# EAGLE board NeoPI-Wireless v44 (EAGLE 9.7.0)
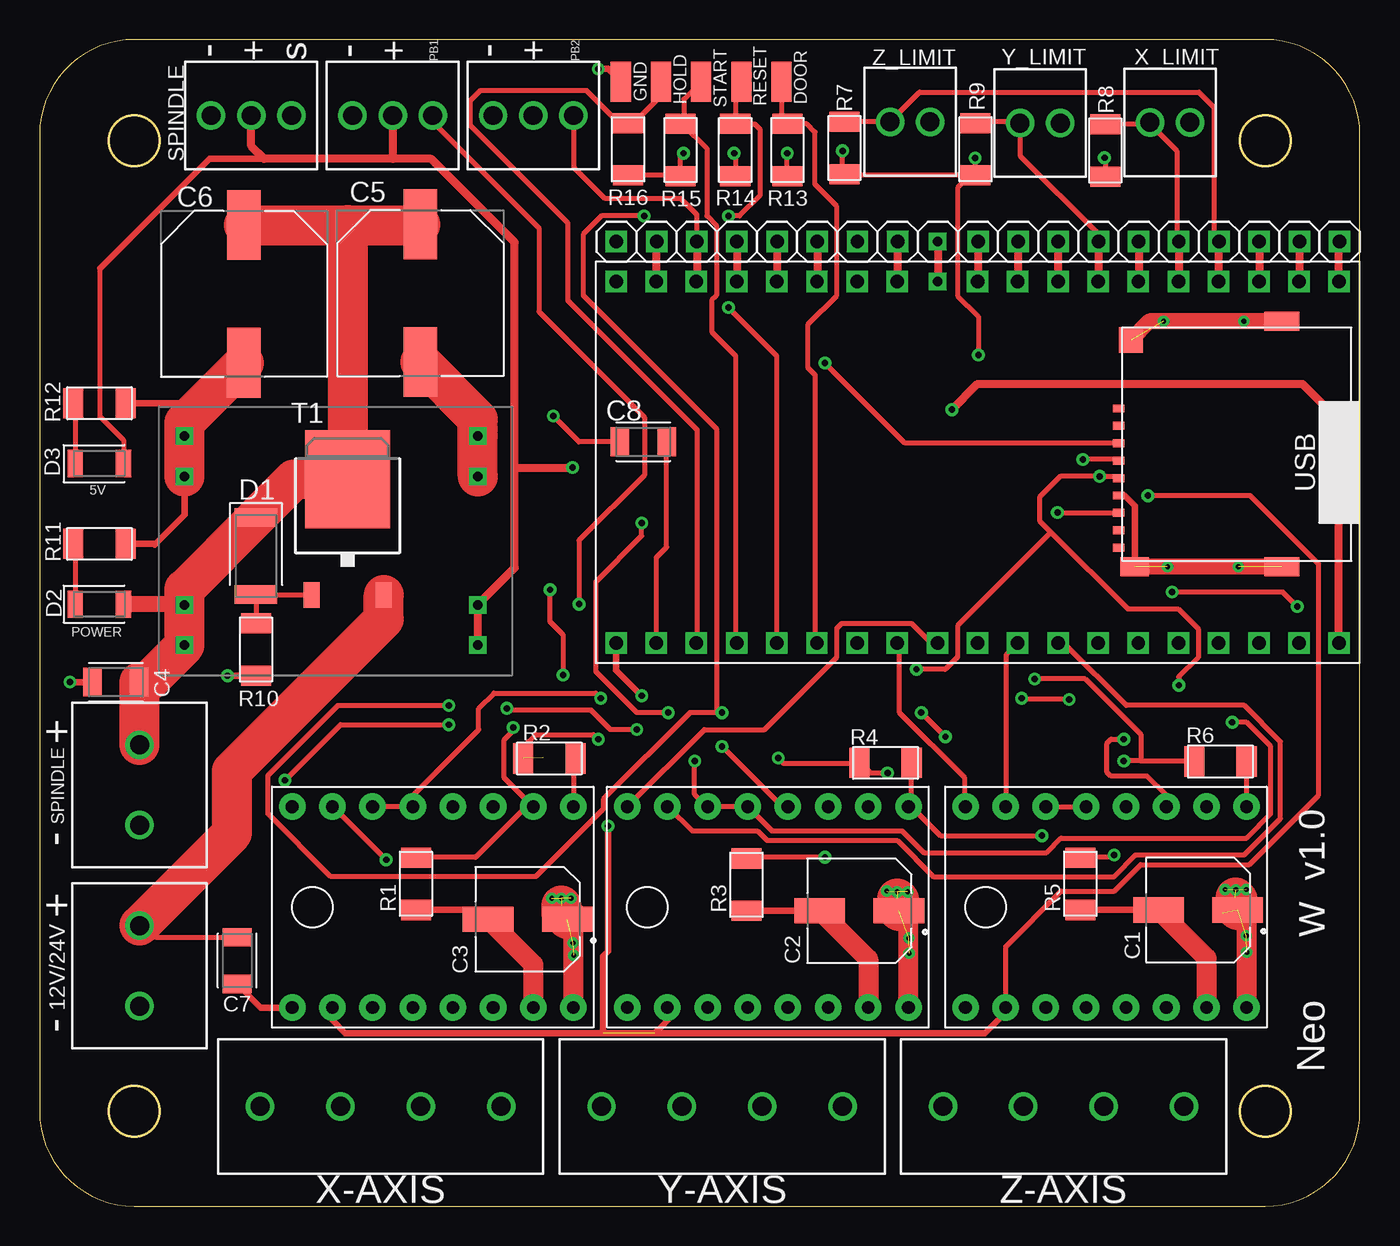
[diagram p0: board, top side]
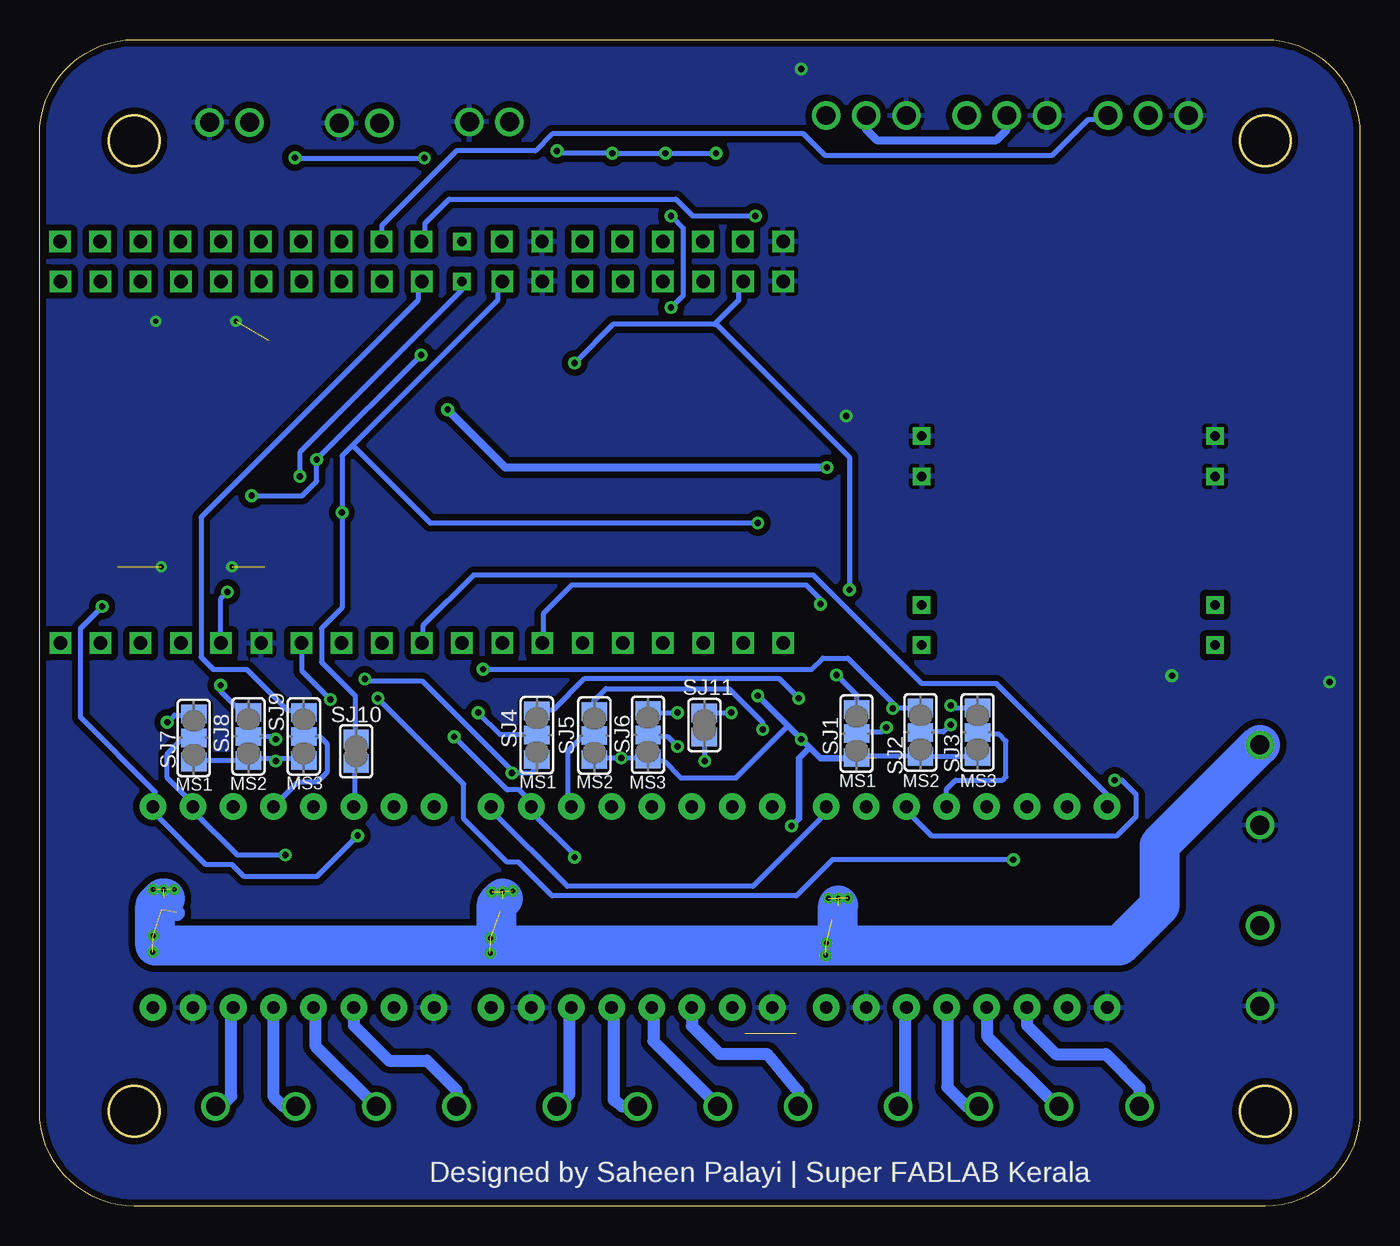
[diagram p1: board, bottom side, seen from below]

Size 83.49 x 73.74 mm. Coordinates in mm from the lower left corner, seen from the top.
Outline: 77.49,0 arc90 83.49,6 83.49,67.74 arc90 77.49,73.74 6,73.74 arc90 0,67.74 0,6 arc90 6,0 77.49,0
Outline: circle at 77.49,6 radius 1.6
Outline: circle at 6,6 radius 1.6
Outline: circle at 6,67.33 radius 1.6
Outline: circle at 77.49,67.33 radius 1.6
Copper layers (1*16): Top 0.035mm / dielectric 1.5mm / Bottom 0.035mm
Design rules "default *": minimum track width 12mil, minimum drill 0.4mm, track to track 12mil, track to pad 16mil, pad to pad 16mil, via to via 16mil, smd to smd 10mil, copper to edge 16mil, drill to drill 6mil, minimum pad ring 10mil, minimum via ring 8mil, stop-mask expansion 4mil, vias tented up to drill 16mil, thermal gap 10mil
Net classes: 1 vcc: width 1.016 mm, drill 0.8 mm, clearance 0.508 mm; 2 motor_out: width 0.762 mm, drill 0.8 mm, clearance 0.508 mm; 3 +5vcc: width 0.406 mm, drill 0.8 mm, clearance 0.508 mm

## Footprints (pad centres in the part's own frame; a part is rotated, then mirrored left to right if it is on the bottom)
CAP_EEEFN1V101XL = smd 3.2 x 1.6: 1 -2.5,0; 2 2.5,0
CAPC3216X135 = smd 1.165 x 1.815: 1 -1.475,0; 2 1.475,0
CAPAE1030X1050N = smd 4.416 x 2.115: 1 -4.353,0; 2 4.353,0
DIOMELF5024 = smd 1.156 x 2.69: 1 -2.43,0; 2 2.43,0
LEDC3216X75N_FLAT-R = smd 0.962 x 1.712: A 1.525,0; C -1.525,0
LEDC3216X75N_FLAT-Y = smd 0.962 x 1.712: A 1.525,0; C -1.525,0
TERMBLK_508-2N = drill 1.2: 1 0,0; 2 5.08,0
TERMBLK_254-3N = drill 1.2: 1 0,0; 2 2.54,0; 3 5.08,0
R1206FAB = smd 1.27 x 1.905: 1 -1.651,0; 2 1.651,0
SJ_2 = smd 1.168 x 1.6: 1 -1.524,0; 2 0,0; 3 1.524,0
SJ = smd 1.168 x 1.6: 1 -0.762,0; 2 0.762,0
TO252 = smd 1 x 1.6: 1 -2.28,-4.8; 2 2.28,-4.8 | smd 5.4 x 6.2: 3 0,2.5
ESP32_GRBL = drill 0.85 square: 3.3V 1.27,46.99; 5V 1.27,1.27; EN 1.27,44.45; GND1 1.27,13.97; GND2 24.13,46.99; GND3 24.13,31.75; GPIO0 24.13,13.97; GPIO2 24.13,11.43; GPIO4 24.13,16.51; GPIO5 24.13,24.13; GPIO6 24.13,1.27; GPIO7 24.13,3.81; GPIO8 24.13,6.35; GPIO9 1.27,8.89; GPIO10 1.27,6.35; GPIO11 1.27,3.81; GPIO12 1.27,16.51; GPIO13 1.27,11.43; GPIO14 1.27,19.05; GPIO15 24.13,8.89; GPIO16 24.13,19.05; GPIO17 24.13,21.59; GPIO19 24.13,29.21; GPIO21 24.13,34.29; GPIO22 24.13,41.91; GPIO23 24.13,44.45; GPIO25 1.27,26.67; GPIO26 1.27,24.13; GPIO27 1.27,21.59; GPIO32 1.27,31.75; GPIO33 1.27,29.21; GPIO34 1.27,36.83; GPIO35 1.27,34.29; GPIO36 1.27,41.91; GPIO39 1.27,39.37; RX 24.13,36.83; TX 24.13,39.37 | drill 0.6 square: GPIO18 24.13,26.67
BOARD_A4988 = drill 0.8 pad 1.676: +5V 1.27,16.51; DIR 13.97,19.05; ENABLE 13.97,1.27; GND 1.27,19.05; GNDMOT 1.27,3.81; M1A 1.27,11.43; M1B 1.27,13.97; M2A 1.27,8.89; M2AB 1.27,6.35; MS1 13.97,3.81; MS2 13.97,6.35; MS3 13.97,8.89; RESET 13.97,11.43; SLEEP 13.97,13.97; STEP 13.97,16.51; VMOT 1.27,1.27
MICROSD-PUSH-OUT = smd 0.5 x 0.75: 1 9.625,0.225; 2 8.525,0.225; 3 7.425,0.225; 4 6.325,0.225; 5 5.225,0.225; 6 4.125,0.225; 7 3.025,0.225; 8 1.925,0.225; CD 0.825,0.225 | smd 1.2 x 1.8: G1 -0.375,-0.8 | smd 1.2 x 2.2: G2 -0.375,-10.1; G4 15.125,-10.1 | smd 1.6 x 1.5: G3 13.95,-0.55
1X19 = drill 0.85 square: 1 -24.13,0; 2 -21.59,0; 3 -19.05,0; 4 -16.51,0; 5 -13.97,0; 6 -11.43,0; 7 -8.89,0; 8 -6.35,0; 10 -1.27,0; 11 1.27,0; 12 3.81,0; 13 6.35,0; 14 8.89,0; 15 11.43,0; 16 13.97,0; 17 16.51,0; 18 19.05,0; 19 21.59,0 | drill 0.6 square: 9 -3.81,0
MINI_BUCK_CONVERTER = drill 0.6 square: 1IN+ 0,0; 1IN- 0,10.668; 1OUT+ 18.542,0; 1OUT- 18.542,10.668; 2IN+ 0,2.54; 2IN- 0,13.208; 2OUT+ 18.542,2.54; 2OUT- 18.542,13.208
1X05_SMD = smd 2.54 x 1.27: 1 0,5.08; 2 0,2.54; 3 0,0; 4 0,-2.54; 5 0,-5.08
TERMBLK_508-4N = drill 1.2: 1 0,0; 2 5.08,0; 3 10.16,0; 4 15.24,0
TERMBLK_254-2N = drill 1.2: 1 0,0; 2 2.54,0

## Placement (x,y rotation side)
C1  EEEFN1V101XL  [CAP_EEEFN1V101XL]  73.25,18.72 180 top
C2  EEEFN1V101XL  [CAP_EEEFN1V101XL]  51.84,18.67 180 top
C3  EEEFN1V101XL  [CAP_EEEFN1V101XL]  30.86,18.14 180 top
C4  0.1uF  [CAPC3216X135]  4.83,33.12 180 top
C5  470uF  [CAPAE1030X1050N]  24.08,57.71 270 top
C6  470uF  [CAPAE1030X1050N]  12.93,57.66 270 top
C7  0.1uF  [CAPC3216X135]  12.5,15.52 270 top
C8  10uF  [CAPC3216X135]  38.18,48.31 180 top
D1  DIODE  [DIOMELF5024]  13.69,41.1 270 top
D2  LED_RED  [LEDC3216X75N_FLAT-R]  3.78,38.05 0 top
D3  LED_YELLOW  [LEDC3216X75N_FLAT-Y]  3.78,46.94 0 top
POWER  2828XX-2282837-2  [TERMBLK_508-2N]  6.32,17.73 270 top
PROBE1  2828XX-3282834-3  [TERMBLK_254-3N]  24.87,68.94 180 top
PROBE2  2828XX-3282834-3  [TERMBLK_254-3N]  33.76,68.94 180 top
R1  100KΩ  [R1206FAB]  23.8,20.37 90 top
R2  10KΩ  [R1206FAB]  32.23,28.3 180 top
R3  100KΩ  [R1206FAB]  44.7,20.32 90 top
R4  10KΩ  [R1206FAB]  53.49,28.02 180 top
R5  100KΩ  [R1206FAB]  65.81,20.37 90 top
R6  10KΩ  [R1206FAB]  74.67,28.1 180 top
R7  10k  [R1206FAB]  50.9,66.88 270 top
R8  10k  [R1206FAB]  67.39,66.73 270 top
R9  10k  [R1206FAB]  59.18,66.8 270 top
R10  1KΩ  [R1206FAB]  13.69,35.18 270 top
R11  1KΩ  [R1206FAB]  3.78,41.86 0 top
R12  500Ω  [R1206FAB]  3.78,50.75 0 top
R13  10k  [R1206FAB]  47.3,66.75 270 top
R14  10k  [R1206FAB]  43.99,66.75 270 top
R15  10k  [R1206FAB]  40.54,66.75 270 top
R16  10k  [R1206FAB]  37.21,66.8 270 top
SJ1  [SJ_2]  31.83,29.87 90 bottom
SJ2  [SJ_2]  27.79,29.95 90 bottom
SJ3  [SJ_2]  24.18,29.95 90 bottom
SJ4  [SJ_2]  52.04,29.77 90 bottom
SJ5  [SJ_2]  48.41,29.74 90 bottom
SJ6  [SJ_2]  45.02,29.79 90 bottom
SJ7  [SJ_2]  73.74,29.59 90 bottom
SJ8  [SJ_2]  70.28,29.69 90 bottom
SJ9  [SJ_2]  66.78,29.69 90 bottom
SJ10  [SJ]  63.47,28.75 270 bottom
SJ11  [SJ]  41.45,30.4 270 bottom
SPINDLE  2828XX-3282834-3  [TERMBLK_254-3N]  15.93,68.94 180 top
SPINDLE_POWER  2828XX-2282837-2  [TERMBLK_508-2N]  6.32,29.16 270 top
T1  [TO252]  19.48,43.43 0 top
U$1  ESP32_GRBL  [ESP32_GRBL]  83.45,34.32 90 top
U$2  BOARD_A4988  [BOARD_A4988]  35.03,11.28 90 top
U$3  MICROSD-PUSH-OUT  [MICROSD-PUSH-OUT]  68.45,40.79 90 top
U$4  PINHD-1X19  [1X19]  60.61,60.96 0 top
U$5  BOARD_A4988  [BOARD_A4988]  56.21,11.28 90 top
U$6  MINI-360_DC-TO-DC_BUCK_CONVERTER  [MINI_BUCK_CONVERTER]  9.17,35.46 0 top
U$7  BOARD_A4988  [BOARD_A4988]  77.6,11.28 90 top
U$8  1X05_SMD  [1X05_SMD]  41.83,71.07 90 top
X-AXIS  2828XX-4282837-4  [TERMBLK_508-4N]  13.94,6.3 0 top
X_LIMIT  2828XX-2282834-2  [TERMBLK_254-2N]  72.75,68.5 180 top
Y-AXIS  2828XX-4282837-4  [TERMBLK_508-4N]  35.53,6.3 0 top
Y_LIMIT  2828XX-2282834-2  [TERMBLK_254-2N]  64.54,68.45 180 top
Z-AXIS  2828XX-4282837-4  [TERMBLK_508-4N]  57.12,6.3 0 top
Z_LIMIT  2828XX-2282834-2  [TERMBLK_254-2N]  56.31,68.54 180 top

## Library data of the parts
C1-C3 = EEEFN1V101XL; MANUFACTURER: Panasonic; MAXIMUM_PACKAGE_HEIGHT: 7.7mm; PARTREV: 10-Oct-19; STANDARD: Manufacturer Recommendations
C4-C8 = Capacitor; CATEGORY: Capacitor
D1 = Diode; CATEGORY: Diode; SUB-CATEGORY: Rectifier
D2 = LED; CATEGORY: LED; COLOR: RED; DESCRIPTION: CHIP LED FLAT; SUB-CATEGORY: CHIP; TYPE: FLAT_TOP
D3 = LED; CATEGORY: LED; COLOR: YELLOW; DESCRIPTION: CHIP LED FLAT; SUB-CATEGORY: CHIP; TYPE: FLAT_TOP
POWER SPINDLE_POWER = Connector; CATEGORY: Connector; DESCRIPTION: 2 Position Wire to Board Terminal Block Horizontal with Board 5.08 mm Through Hole; MANUFACTURER: TE Connectivity; MPN: 282837-2; OPERATING_TEMPERATURE: -40°C to +105°C; PART_STATUS: ACTIVE; ROHS_COMPLIANCE: RoHS Compliant; SERIES: 282837; SUBCATEGORY: Terminal Block; TYPE: Side Wire Entry
PROBE1 PROBE2 SPINDLE = Connector; CATEGORY: Connector; DESCRIPTION: TERM BLK 3P SIDE ENT 2.54mm PCB; MANUFACTURER: TE Connectivity; MPN: 282834-3; OPERATING_TEMPERATURE: -40°C to +105°C; PART_STATUS: Active; ROHS_COMPLIANCE: RoHS Compliant; SERIES: 282834; SUBCATEGORY: Terminal Block; TYPE: Side Wire Entry
R1-R16 T1 U$4 U$8 = files_fab
SJ1-SJ11 = jumper
U$1 = ESP32-GRBL
U$2 U$5 U$7 = Clean-Kong
U$3 = microsd
U$6 = MINI-BUCK-CONVERTER
X-AXIS Y-AXIS Z-AXIS = Connector; CATEGORY: Connector; DESCRIPTION: TERM BLK 4P SIDE ENT 5.08mm PCB; MANUFACTURER: TE Connectivity; MPN: 282837-4; OPERATING_TEMPERATURE: 40°C to +105°C; PART_STATUS: Active; ROHS_COMPLIANCE: RoHS Compliant; SERIES: 283737; SUBCATEGORY: Terminal Block; TYPE: Side Wire Entry
X_LIMIT Y_LIMIT Z_LIMIT = Connector

## Nets
+3.3V: R2.2 R4.2 R6.2 R7.2 R8.2 R9.2 R13.2 R14.2 R15.2 R16.2 SJ1.1 SJ2.1 SJ3.1 SJ4.1 SJ5.1 SJ6.1 SJ7.1 SJ8.1 SJ9.1 U$1.3.3V U$2.+5V U$3.4 U$5.+5V U$7.+5V
+5V: D3.A PROBE1.2 PROBE2.2 SPINDLE.2 U$1.5V U$6.1OUT+ U$6.2OUT+
CS: SJ3.3 SJ6.3 SJ9.3 U$1.GPIO5 U$4.10
CS_SD: U$3.2
DOOR: R13.1 U$1.GPIO35 U$8.5
GND [gnd]: C1.2 C2.2 C3.2 C4.2 C5.2 C6.2 C7.2 C8.2 POWER.2 PROBE1.3 PROBE2.3 R1.1 R3.1 R5.1 R10.2 R11.2 R12.2 SPINDLE.3 SPINDLE_POWER.2 U$1.GND1 U$1.GND2 U$1.GND3 U$2.GND U$2.GNDMOT U$3.6 U$3.G1 U$3.G2 U$3.G3 U$3.G4 U$4.1 U$4.7 U$5.GND U$5.GNDMOT U$6.1IN- U$6.1OUT- U$6.2IN- U$6.2OUT- U$7.GND U$7.GNDMOT U$8.1 X_LIMIT.1 Y_LIMIT.1 Z_LIMIT.1
GRBL_RESET: R14.1 U$1.GPIO34 U$8.4
HOLD: R16.1 U$1.GPIO36 U$8.2
MISO: SJ10.1 SJ11.1 U$1.GPIO19 U$3.7 U$4.8
MOSI: SJ1.3 U$1.GPIO23 U$3.3 U$4.2
N$1 [motor_out]: U$2.M1B X-AXIS.1
N$2 [motor_out]: U$2.M1A X-AXIS.2
N$3 [motor_out]: U$2.M2A X-AXIS.3
N$4 [motor_out]: U$2.M2AB X-AXIS.4
N$5: U$1.TX U$4.4
N$6: D2.C R11.1
N$7: U$1.GPIO21 U$4.6
N$8 [motor_out]: U$5.M1B Y-AXIS.1
N$9 [motor_out]: U$5.M1A Y-AXIS.2
N$10: D3.C R12.1
N$11: C8.1 U$1.EN
N$12 [motor_out]: U$5.M2A Y-AXIS.3
N$13 [motor_out]: U$5.M2AB Y-AXIS.4
N$14 [motor_out]: U$7.M1B Z-AXIS.1
N$15 [motor_out]: U$7.M1A Z-AXIS.2
N$16: SJ10.2 U$7.RESET U$7.SLEEP
N$17 [motor_out]: U$7.M2A Z-AXIS.3
N$18 [motor_out]: U$7.M2AB Z-AXIS.4
N$19: U$1.RX U$4.5
N$21: U$1.GPIO16 U$4.12
N$22: C7.1 POWER.1 T1.2
N$23: U$1.GPIO0 U$4.14
N$26: U$1.GPIO8 U$4.17
N$27: U$1.GPIO7 U$4.18
N$28: U$1.GPIO6 U$4.19
N$30: D1.2 R10.1 T1.1
PROBE1: PROBE1.1 U$1.GPIO32
PROBE2: PROBE2.1 U$1.GPIO22 U$4.3
SCK: SJ2.3 SJ5.3 SJ8.3 U$1.GPIO18 U$3.5 U$4.9
SPINDLE_PWM: SPINDLE.1 U$1.GPIO17 U$4.11
START: R15.1 U$1.GPIO39 U$8.3
STEPPER_EN: R2.1 R4.1 R6.1 U$1.GPIO13 U$2.ENABLE U$5.ENABLE U$7.ENABLE
TO_Y: SJ4.3 U$2.RESET U$2.SLEEP
TO_Z: SJ7.3 SJ11.2 U$5.RESET U$5.SLEEP
VCC [vcc]: C1.1 C2.1 C3.1 C4.1 C5.1 C6.1 D1.1 D2.A SPINDLE_POWER.1 T1.3 U$2.VMOT U$5.VMOT U$6.1IN+ U$6.2IN+ U$7.VMOT
X-MS1: R1.2 SJ1.2 U$2.MS1
X-MS2: SJ2.2 U$2.MS2
X-MS3: SJ3.2 U$2.MS3
X_DIR: U$1.GPIO26 U$2.DIR
X_LIMIT: R8.1 U$1.GPIO2 U$4.15 X_LIMIT.2
X_STEP: U$1.GPIO12 U$2.STEP
Y-MS1: R3.2 SJ4.2 U$5.MS1
Y-MS2: SJ5.2 U$5.MS2
Y-MS3: SJ6.2 U$5.MS3
Y_DIR: U$1.GPIO25 U$5.DIR
Y_LIMIT: R9.1 U$1.GPIO4 U$4.13 Y_LIMIT.2
Y_STEP: U$1.GPIO14 U$5.STEP
Z-MS1: R5.2 SJ7.2 U$7.MS1
Z-MS2: SJ8.2 U$7.MS2
Z-MS3: SJ9.2 U$7.MS3
Z_DIR: U$1.GPIO33 U$7.DIR
Z_LIMIT: R7.1 U$1.GPIO15 U$4.16 Z_LIMIT.2
Z_STEP: U$1.GPIO27 U$7.STEP

## Tracks (layer width: path | path; a pad name or v marks a point on that pad's centre or on a via)
+3.3V  (via drill 0.4)  (2 unrouted)
  Top 0.305: R16.2 37.31,65.18 40.51,65.18 R15.2 40.51,65.33 40.51,66.35 v40.72,66.55 | v43.92,66.55 44.02,66.45 44.02,65.18 R14.2 | v47.27,66.55 47.27,65.13 R13.2 | v65.96,47.19 68.1,47.19 U$3.4 | v59.36,53.8 59.36,56.24 58.04,57.56 58.04,64.36 58.83,65.15 R9.2 | R9.2 59.11,65.02 59.13,65.05 59,65.18 51.03,65.18 R7.2 50.88,65.33 50.77,65.43 v50.77,66.7 | v67.34,66.27 67.39,66.22 R8.2 | v59.16,66.24 59.16,65.18 R9.2 | 39.34,11.38 38.89,10.92 | 69.62,28.14 v68.55,28.14 | 69.62,28.14 72.97,28.14 R6.2 | v53.62,27.38 52.55,27.38 51.94,27.99 R4.2 51.79,27.99 47.04,27.99 v46.71,28.32 | 69.62,28.14 69.62,29.82 66.12,33.33 v62.92,33.33 | U$7.+5V 61.09,16.41 64.59,19.91 67.94,19.91 69.62,21.59 76.48,21.59 80.87,25.98 80.87,40.59 76.55,44.91 v70.08,44.91 | R2.2 30.58,29 31.39,29.81 35.01,29.81 35.3,29.52 v35.33,29.52
  Top 0.406: U$1.3.3V 36.46,33.88 v38.07,32.26 | v35.94,24.03 35.94,16.1 35.64,15.8 35.64,10.92 | U$2.+5V 18.52,11.74 19.33,10.92 38.99,10.92 | 38.99,10.92 38.99,11.02 39.34,11.38 39.7,11.74 U$5.+5V | 38.99,10.92 59.77,10.92 61.09,12.24 U$7.+5V
  Bottom 0.305: v40.72,66.55 v43.92,66.55 v47.27,66.55 50.77,66.55 v50.77,66.7 | v59.36,53.8 v65.96,47.19 65.96,45.82 66.88,44.91 v70.08,44.91 | v67.34,66.27 67.31,66.24 v59.16,66.24 | SJ3.1 24.21,28.45 27.71,28.45 SJ2.1 27.86,28.45 31.83,28.45 SJ1.1 | 34.11,28.3 34.8,28.98 36.17,30.35 | 36.17,30.35 v38.07,32.26 | 31.98,28.3 SJ1.1 | 68.55,28.3 70.23,28.3 SJ8.1 70.38,28.14 73.74,28.14 SJ7.1 | 68.55,28.3 66.88,28.3 SJ9.1 | 68.55,28.3 v68.55,28.14 | SJ4.1 52.04,27.74 52.4,27.38 v53.62,27.38 53.62,27.53 59.26,33.17 62.76,33.17 v62.92,33.33 | 48.49,28.09 48.44,28.14 SJ5.1 48.29,28.3 48.26,28.32 v46.71,28.32 45.16,28.32 45.14,28.3 SJ6.1 44.98,28.14 44.02,28.14 42.95,27.08 39.45,27.08 36.17,30.35 | 32.21,28.73 SJ1.1
  Bottom 0.406: v38.07,32.26 34.11,28.3 31.98,28.3 | 34.8,28.98 35.48,28.3 35.48,24.49 v35.94,24.03
+5V  (via drill 0.4)
  Top 0.305: 3.84,59.28 3.84,49.89 5.31,48.41 5.31,47.04 D3.A | 13.39,68.83 SPINDLE.2 | 82.12,35.61 U$1.5V
  Top 0.406: 3.84,59.28 10.74,66.19 14.2,66.19
  Top 0.508: 30.05,46.69 30.05,40.34 U$6.2OUT+ U$6.1OUT+ | 30.05,46.69 30.05,60.91 24.76,66.19 22.33,66.19 | 22.33,66.19 14.2,66.19 13.39,67.01 SPINDLE.2 | PROBE1.2 22.33,66.19 | 30.05,46.69 v33.71,46.69 | v57.68,50.34 59.31,51.97 79.85,51.97 82.12,49.7 82.12,35.61
  Bottom 0.508: PROBE1.2 22.33,68.05 23,67.38 30.54,67.38 31.22,68.05 PROBE2.2 | v33.71,46.69 54.03,46.69 v57.68,50.34
CS  (via drill 0.4)
  Top 0.305: v25.88,31.65 18.87,31.65 14.45,27.23 14.45,24.79 18.41,20.83 31.37,20.83 35.64,25.1 35.64,25.71 41.12,31.19 42.8,31.19 | v43.15,31.19 42.8,31.19 | v38.23,62.59 35.53,62.59 34.37,61.42 34.37,57.57 42.8,49.14 42.8,31.19
  Top 0.508: U$4.10 59.34,58.47 U$1.GPIO5
  Bottom 0.305: v25.88,31.65 25.73,31.5 24.21,31.5 SJ3.3 | v43.15,31.19 44.98,31.19 SJ6.3 | SJ9.3 66.88,31.34 67.79,31.34 70.38,33.93 72.52,33.93 73.28,34.7 73.28,43.54 59.56,57.25 59.56,58.17 59.41,58.32 U$1.GPIO5 | v38.23,62.59 42.19,62.59 43.26,63.65 57.58,63.65 59.11,62.13 59.11,61.21 59.26,61.06 U$4.10
DOOR
  Top 0.305: U$8.5 46.91,69.04 R13.1 48.51,68.4 49.03,67.88 49.03,64.58 50.42,63.2 50.42,57.56 48.59,55.73 48.59,52.98 49.05,52.53 49.05,35.61 U$1.GPIO35
GND  (via drill 0.3, 0.4)  (3 unrouted)
  Top 0.305: C8.2 34.11,48.31 v32.49,49.94
  Top 0.406: C4.2 v1.93,33.12 | v11.89,33.53 R10.2 | R11.2 7.24,41.86 7.29,41.81 9.18,43.7 9.18,46.11 U$6.1IN- | C7.2 13.99,12.55 U$2.GND | U$8.1 35.94,71.88 v35.33,71.88 | U$3.6 68.24,44.91 68.63,44.91 69.25,44.28 U$3.G1 | C1.2 R5.1 | R3.1 C2.2 | R1.1 27.78,18.72 C3.2 | R12.2 10.13,50.75 10.25,50.63
  Top 1.016: U$3.G4 70.18,55.92 U$3.G3 | U$3.G2 U$3.G1
  Top 1.27: 27.71,49.12 27.71,49.72 | C1.2 73.79,15.69 U$7.GNDMOT | C2.2 52.4,15.61 U$5.GNDMOT | C3.2 31.22,15.28 U$2.GNDMOT
  Top 2.54: C6.2 10.25,50.63 9.17,49.55 U$6.2IN- U$6.1IN- | U$6.1OUT- 27.71,49.12 | U$6.2OUT- 27.71,49.72 C5.2
  other vias: 75.79,40.41 71.32,40.41 76.15,55.93 71.07,55.93
  pour Bottom (isolate 0.406): 0.04,-0.71 82.82,-0.71 84.35,0.83 84.35,73.04 83.63,73.76 0.44,73.76 -0.28,73.04 -0.28,-0.39
GRBL_RESET  (via drill 0.4)
  Top 0.305: U$8.4 44.32,70.97 44.02,70.66 44.02,68.53 R14.1 45.21,68.4 45.54,68.07 45.54,63.86 44.27,62.59 v43.56,62.59 | v43.56,56.79 46.61,53.75 46.61,35.61 U$1.GPIO34
  Bottom 0.305: v43.56,56.79 42.8,57.56 42.8,61.82 v43.56,62.59
HOLD
  Top 0.305: U$8.2 39.29,70.18 37.57,68.45 R16.1 37.26,68.71 36.4,68.71 34.59,70.51 27.86,70.51 27.22,69.86 27.22,68.33 33.4,62.15 33.4,57.25 41.58,49.07 41.58,35.61 U$1.GPIO36
MISO  (via drill 0.4)
  Top 0.305: v39.75,31.19 37.77,31.19 35.18,33.78 35.18,39.47 38.07,42.37 v38.07,43.18 | v64.36,43.84 68.2,43.84 U$3.7
  Top 0.508: U$4.8 54.26,58.47 U$1.GPIO19
  Bottom 0.305: 63.7,48.08 54.53,57.25 54.53,58.17 54.38,58.32 U$1.GPIO19 | 63.7,48.08 64.36,47.42 v64.36,43.84 64.36,37.82 65.66,36.53 65.66,34.39 63.53,32.26 63.53,29.57 SJ10.1 | v39.75,31.19 41.43,31.19 SJ11.1 | 63.7,48.08 58.8,43.18 v38.07,43.18
MOSI  (via drill 0.4)
  Top 0.305: v49.66,53.29 54.69,48.26 68.1,48.26 U$3.3 | v32.28,38.96 32.28,36.93 33.1,36.12 v33.1,33.58
  Top 0.508: U$4.2 39.02,58.47 U$1.GPIO23
  Bottom 0.305: v49.66,53.29 47.22,55.73 40.82,55.73 40.74,55.8 | 40.74,55.8 39.29,57.25 39.29,58.17 39.14,58.32 U$1.GPIO23 | SJ1.3 31.83,32.31 v33.1,33.58 | v32.28,38.96 32.28,47.35 40.74,55.8
N$1
  Bottom 0.762: X-AXIS.1 13.94,7.46 16.08,9.6 19.23,9.6 21.06,11.43 U$2.M1B
N$2
  Bottom 0.762: U$2.M1A 23.58,12.54 23.58,10.75 19.14,6.3 X-AXIS.2
N$3
  Bottom 0.762: X-AXIS.3 24.88,6.3 26.1,7.52 26.1,12.52 U$2.M2A
N$4
  Bottom 0.762: U$2.M2AB 28.75,12.52 28.75,6.79 29.17,6.38 X-AXIS.4
N$5
  Top 0.508: U$4.4 44.1,58.47 U$1.TX
N$6
  Top 0.305: D2.C 2.26,41.86 R11.1
N$7
  Top 0.305: 49.2,58.47 U$1.GPIO21
  Top 0.508: U$4.6 49.18,58.49 49.2,58.47
N$8
  Bottom 0.762: U$5.M1B 42.24,11.38 40.49,9.63 37.49,9.63 35.53,7.27 Y-AXIS.1
N$9
  Bottom 0.762: Y-AXIS.2 40.61,6.36 44.68,10.43 44.68,12.52 U$5.M1A
N$10
  Top 0.305: D3.C 2.26,47.04 2.26,50.7 R12.1
N$11
  Top 0.305: U$1.EN 39,41 39.65,41.66 C8.1
N$12
  Bottom 0.762: U$5.M2A 47.19,12.52 47.19,6.71 46.64,6.3 Y-AXIS.3
N$13
  Bottom 0.762: U$5.M2AB 49.99,12.52 49.99,7.07 50.69,6.38 Y-AXIS.4
N$14
  Bottom 0.762: Z-AXIS.1 57.12,7.33 58.99,9.2 61.4,9.2 63.63,11.43 U$7.M1B
N$15
  Bottom 0.762: Z-AXIS.2 66.05,10.15 66.05,12.52 U$7.M1A
N$16
  Top 0.305: U$7.SLEEP U$7.RESET
  Bottom 0.305: U$7.SLEEP 63.53,25.35 63.53,27.89 SJ10.2
N$17
  Bottom 0.762: U$7.M2A 68.71,6.96 68.05,6.3 Z-AXIS.3
N$18
  Bottom 0.762: Z-AXIS.4 72.01,6.3 71.36,6.95 71.36,12.52 U$7.M2AB
N$19
  Top 0.508: U$4.5 46.64,58.47 U$1.RX
N$21
  Top 0.508: U$4.12 64.42,58.47 U$1.GPIO16
N$22
  Top 0.305: C7.1 12.41,16.99 7.38,16.99 6.68,17.69 6.4,17.69 POWER.1
  Top 2.54: POWER.1 12.17,23.57 12.17,27.51 21.76,37.11 T1.2
N$23
  Top 0.508: U$4.14 69.5,58.47 U$1.GPIO0
N$26
  Top 0.305: 77.09,58.47 U$1.GPIO8
  Top 0.508: U$4.17 77.12,58.5 77.09,58.47
N$27
  Top 0.305: 79.68,58.47 U$1.GPIO7
  Top 0.508: U$4.18 79.66,58.49 79.68,58.47
N$28
  Top 0.305: 82.12,58.47 U$1.GPIO6
  Top 0.508: U$4.19 82.12,60.89 82.12,58.47
N$30
  Top 0.305: D1.2 17.2,38.66 T1.1 | D1.2 R10.1 | D1.2
PROBE1  (via drill 0.4)
  Top 0.305: PROBE1.1 24.87,68.53 31.57,61.82 31.57,56.53 38.25,49.86 38.25,46.21 34.11,42.07 v34.11,38.05
  Bottom 0.305: v34.11,38.05 34.11,38.35 35.03,39.27 49.81,39.27 51.64,37.44 51.64,35.61 U$1.GPIO32
PROBE2
  Top 0.305: 41.58,58.47 U$1.GPIO22 | PROBE2.1 33.81,68.83 33.81,65.63 35.76,63.68 40.55,63.68 41.56,62.67 U$4.3
  Top 0.508: U$4.3 41.56,58.49 41.58,58.47
SCK  (via drill 0.4)
  Top 0.305: v37.77,30.12 36.09,30.12 34.87,31.34 29.66,31.34 v29.54,31.46 | U$3.5 68.1,46.13 v67.03,46.13 64.54,46.13 63.22,44.81 63.22,43.33 63.96,42.6 | 63.96,42.6 68.81,37.74 72,37.74 73.25,36.5 73.25,34.68 72.03,33.46 v72.03,32.92 | v55.45,33.93 57.28,33.93 58.04,34.7 58.04,36.68 63.96,42.6
  Top 0.508: U$4.9 56.8,58.47 U$1.GPIO18
  Bottom 0.305: v37.77,30.12 37.77,30.58 39.9,32.72 47.68,32.72 48.44,31.95 48.44,31.34 SJ5.3 | SJ2.3 27.86,31.5 29.39,31.5 29.54,31.34 v29.54,31.46 29.54,31.8 32.38,34.65 33.96,34.65 34.67,33.93 v55.45,33.93 | v67.03,46.13 67.03,47.65 56.82,57.86 56.82,58.32 U$1.GPIO18 | v72.03,32.92 72.03,32.54 70.71,31.22 SJ8.3
SPINDLE_PWM
  Top 0.305: 61.85,58.47 U$1.GPIO17
  Top 0.508: U$4.11 61.88,58.5 61.85,58.47
  Bottom 0.305: U$4.11 61.85,61.06 61.85,61.98 57.12,66.7 52.13,66.7 51.07,67.77 35.18,67.77 33.81,66.4 19.48,66.4 17.2,68.68 16.13,68.68 15.98,68.83 SPINDLE.1
START
  Top 0.305: U$8.3 40.74,69.98 40.74,68.4 R15.1 40.67,68.38 42.19,66.85 42.19,62.59 42.8,61.98 42.8,57.56 42.49,57.25 42.49,55.27 44.02,53.75 44.02,35.61 U$1.GPIO39
STEPPER_EN  (via drill 0.4)
  Top 0.305: U$7.ENABLE 76.33,27.99 R6.1 | v71.6,38.81 78.61,38.81 v79.53,37.9 | R4.1 55.14,25.4 54.99,25.25 U$5.ENABLE 55.14,25.25 56.97,23.42 v63.37,23.42 | R2.1 33.81,28.3 33.81,25.25 U$2.ENABLE
  Bottom 0.305: v71.6,38.81 72.06,38.35 72.06,35.61 U$1.GPIO13 | v79.53,37.9 80.9,36.53 80.9,30.89 76.17,26.16 76.17,25.4 U$7.ENABLE 76.17,25.25 76.17,24.79 72.97,21.59 71.3,21.59 70.54,20.83 65.96,20.83 v63.37,23.42 | U$5.ENABLE 54.84,25.25 54.84,24.94 50.11,20.22 38.38,20.22 33.81,24.79 33.81,25.25 U$2.ENABLE
TO_Y  (via drill 0.4)
  Top 0.305: U$2.SLEEP U$2.RESET 23.6,25.95 27.77,30.12 27.77,31.46 28.74,32.43 35.16,32.43 v35.48,32.11
  Bottom 0.305: v35.48,32.11 36.7,33.33 49.05,33.33 51.03,31.34 51.94,31.34 SJ4.3
TO_Z  (via drill 0.4)
  Top 0.305: v41.43,28.14 41.43,26.01 42.19,25.25 U$5.SLEEP U$5.RESET 46.3,23.72 54.53,23.72 55.91,22.35 63.68,22.35 64.59,23.27 76.33,23.27 77.85,24.79 77.85,29.06 76.33,30.58 v75.41,30.58
  Bottom 0.305: v41.43,28.14 41.43,29.52 SJ11.2 | v75.41,30.58 74.96,31.04 73.74,31.04 SJ7.3
VCC  (via drill 0.3)  (17 unrouted)
  Top 1.016: 33.36,18.09 C3.1 | D2.A 8.05,38.05 U$6.2IN+
  Top 1.27: U$2.VMOT 33.76,17.69 33.36,18.09 | U$5.VMOT 54.94,18.07 C2.1 | U$7.VMOT 76.33,18.15 C1.1
  Top 2.54: C6.1 19.48,62.01 | 19.48,62.01 24.03,62.01 C5.1 | 19.48,62.01 T1.3 16.1,45.93 D1.1 9.17,39.01 U$6.2IN+ U$6.1IN+ 6.83,33.12 C4.1 6.3,29.18 SPINDLE_POWER.1 | C3.1 32.99,18.5 32.99,19 | C2.1 54.34,19.34 54.23,19.46 | C1.1 75.75,19.37 75.62,19.51
  Bottom 1.016: 6.26,29.15 SPINDLE_POWER.1 | 74.8,18.54 75.56,19.46
  Bottom 2.54: SPINDLE_POWER.1 12.67,22.81 12.67,19 15.21,16.46 32.99,16.46 | 32.99,16.46 35.48,16.46 54.58,16.46 | 54.58,16.46 56.51,16.46 76.17,16.46 76.17,19 75.72,19.46 75.56,19.46 | 54.58,16.46 54.58,19.08 54.2,19.46 | 32.99,16.46 32.99,19
  other vias: 32.39,19.46 32.99,19.46 33.6,19.46 33.73,16.64 33.78,15.85 54.99,15.98 54.97,16.94 53.57,19.91 54.23,19.86 54.89,19.86 74.96,20.02 75.64,19.99 76.3,20.02 76.3,17.09 76.33,16.05
X-MS1  (via drill 0.4)
  Top 0.305: v29.95,30.25 29.95,30.05 29.39,29.49 29.39,27.08 U$2.MS1 30.91,25.4 27.56,22.05 23.9,22.05 R1.2
  Bottom 0.305: v29.95,30.25 30.23,29.97 31.83,29.97 SJ1.2
X-MS2  (via drill 0.4)
  Top 0.305: v25.88,30.43 19.02,30.43 v15.52,26.92
  Bottom 0.305: v25.88,30.43 26.34,29.97 27.71,29.97 SJ2.2 | v15.52,26.92 15.06,26.92 14.15,26.01 14.15,24.64 15.37,23.42 27.1,23.42 28.63,24.94 28.63,25.25 U$2.MS2
X-MS3
  Bottom 0.305: SJ3.2 24.05,29.82 22.81,29.82 22.38,29.39 22.38,27.13 22.58,26.92 25.58,26.92 26.14,26.37 U$2.MS3
X_DIR
  Bottom 0.305: U$2.DIR 15.98,26.01 22.99,33.02 27.71,33.02 34.57,39.88 56.06,39.88 59.26,36.68 59.26,35.61 U$1.GPIO26
X_LIMIT
  Top 0.305: 72.06,58.47 U$1.GPIO2 | R8.1 70.08,68.38 X_LIMIT.2 70.23,68.38 71.91,66.7 71.91,61.06 U$4.15
  Top 0.508: U$4.15 72.04,58.49 72.06,58.47
X_STEP  (via drill 0.4)
  Top 0.305: v62.1,32.11 62.15,32.06 65.07,32.06 v65.1,32.03 | v21.92,21.9 18.57,25.25 U$2.STEP
  Bottom 0.305: v65.1,32.03 66.88,33.81 66.88,35.46 U$1.GPIO12 | v62.1,32.11 56.67,26.67 56.67,24.49 53.92,21.74 53.21,21.74 51.08,19.61 35.64,19.61 33.35,21.9 v21.92,21.9
Y-MS1  (via drill 0.4)
  Top 0.305: v57.28,29.67 v55.75,31.19 | v49.66,22.05 44.78,22.05 R3.2
  Bottom 0.305: v55.75,31.19 54.38,29.82 52.1,29.82 SJ4.2 | v57.28,29.67 53.92,26.31 53.16,26.31 52.4,25.55 U$5.MS1 52.4,24.94 49.66,22.2 v49.66,22.05
Y-MS2
  Bottom 0.305: U$5.MS2 50.11,25.5 50.11,28.75 49.2,29.67 48.44,29.67 SJ5.2
Y-MS3  (via drill 0.4)
  Top 0.305: U$5.MS3 46.96,25.25 v43.15,29.06
  Bottom 0.305: v43.15,29.06 43.76,29.67 44.98,29.67 SJ6.2
Y_DIR
  Top 0.305: U$5.DIR 42.04,30.12 45.85,30.12 50.42,34.7 50.42,36.53 50.72,36.83 55.14,36.83 56.36,35.61 56.67,35.61 U$1.GPIO25
Y_LIMIT
  Top 0.305: R9.1 59.26,68.53 62,68.53 Y_LIMIT.2 62,66.4 66.88,61.52 66.88,61.06 U$4.13
  Top 0.508: U$4.13 66.94,60.94 U$1.GPIO4
Y_STEP
  Top 0.305: U$1.GPIO14 64.44,35.46 64.9,35.46 68.71,31.65 76.17,31.65 78.46,29.36 78.46,24.49 76.17,22.2 69.32,22.2 67.94,20.83 56.51,20.83 54.23,23.11 46,23.11 45.39,23.72 41.27,23.72 39.75,25.25 U$5.STEP
Z-MS1  (via drill 0.4)
  Top 0.305: v67.94,22.2 67.79,22.05 65.81,22.05 R5.2
  Bottom 0.305: SJ7.2 73.74,29.52 74.5,29.52 75.41,28.6 75.41,27.08 73.89,25.55 73.89,25.25 U$7.MS1 73.74,25.25 73.74,24.94 70.99,22.2 v67.94,22.2
Z-MS2  (via drill 0.4)
  Top 0.305: v68.55,29.52 67.74,29.52 67.49,29.26 67.49,27.43 67.74,27.18 70.03,27.18 71.25,25.96 U$7.MS2
  Bottom 0.305: v68.55,29.52 68.71,29.67 70.23,29.67 SJ8.2
Z-MS3
  Bottom 0.305: U$7.MS3 67.13,26.82 65.91,26.82 65.28,27.46 65.28,29.18 65.76,29.67 66.73,29.67 SJ9.2
Z_DIR
  Top 0.305: U$1.GPIO33 54.38,35.46 54.38,31.19 58.5,27.08 58.5,25.25 U$7.DIR
Z_LIMIT
  Top 0.305: 74.52,58.46 U$1.GPIO15 | R7.1 Z_LIMIT.2 55.64,70.41 73.31,70.41 74.26,69.46 74.26,61.29 U$4.16
  Top 0.508: U$4.16 74.52,60.91 74.52,58.46
Z_STEP
  Top 0.305: U$7.STEP 61.14,25.3 61.14,34.87 U$1.GPIO27

## Text on the board
tNames: + | s | + | PB1 | + | PB2 | - | - | - | GND | HOLD | RESET | DOOR | START | 5V | POWER | + | SPINDLE | - | + | W v1.0 | C3 | 𝝿 | 12V/24V | - | Neo
bNames: MS3 | MS2 | MS1 | MS3 | MS2 | MS1 | MS3 | MS2 | MS1 | Designed by Saheen Palayi | Super FABLAB Kerala